# Altium PCB PCB1.PcbDoc
Units mil, origin at the board's own origin, x right, y up, seen from the top; angles counter-clockwise.
Board outline 3040 x 2075 mil, 2 copper layers (Top Layer, Bottom Layer); 44 components, 36 nets, 218 pads, 26 vias.
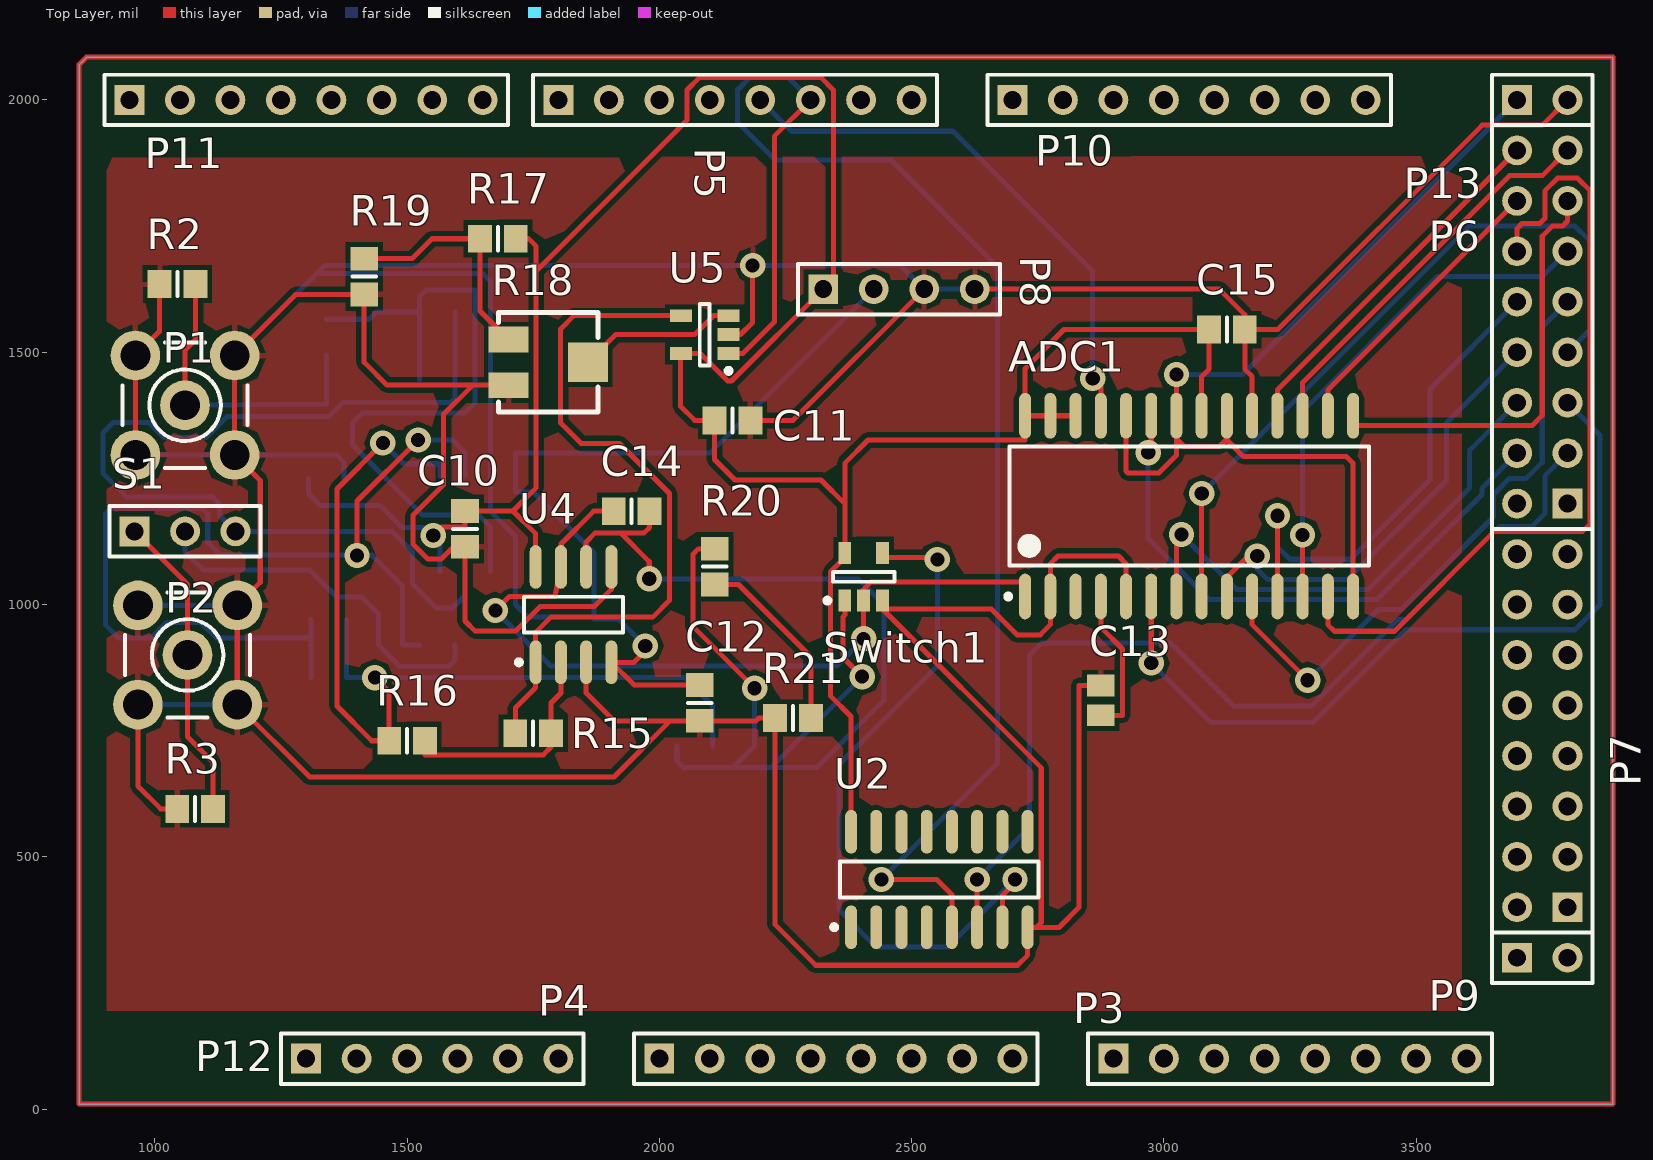
[diagram p0: Top Layer view]
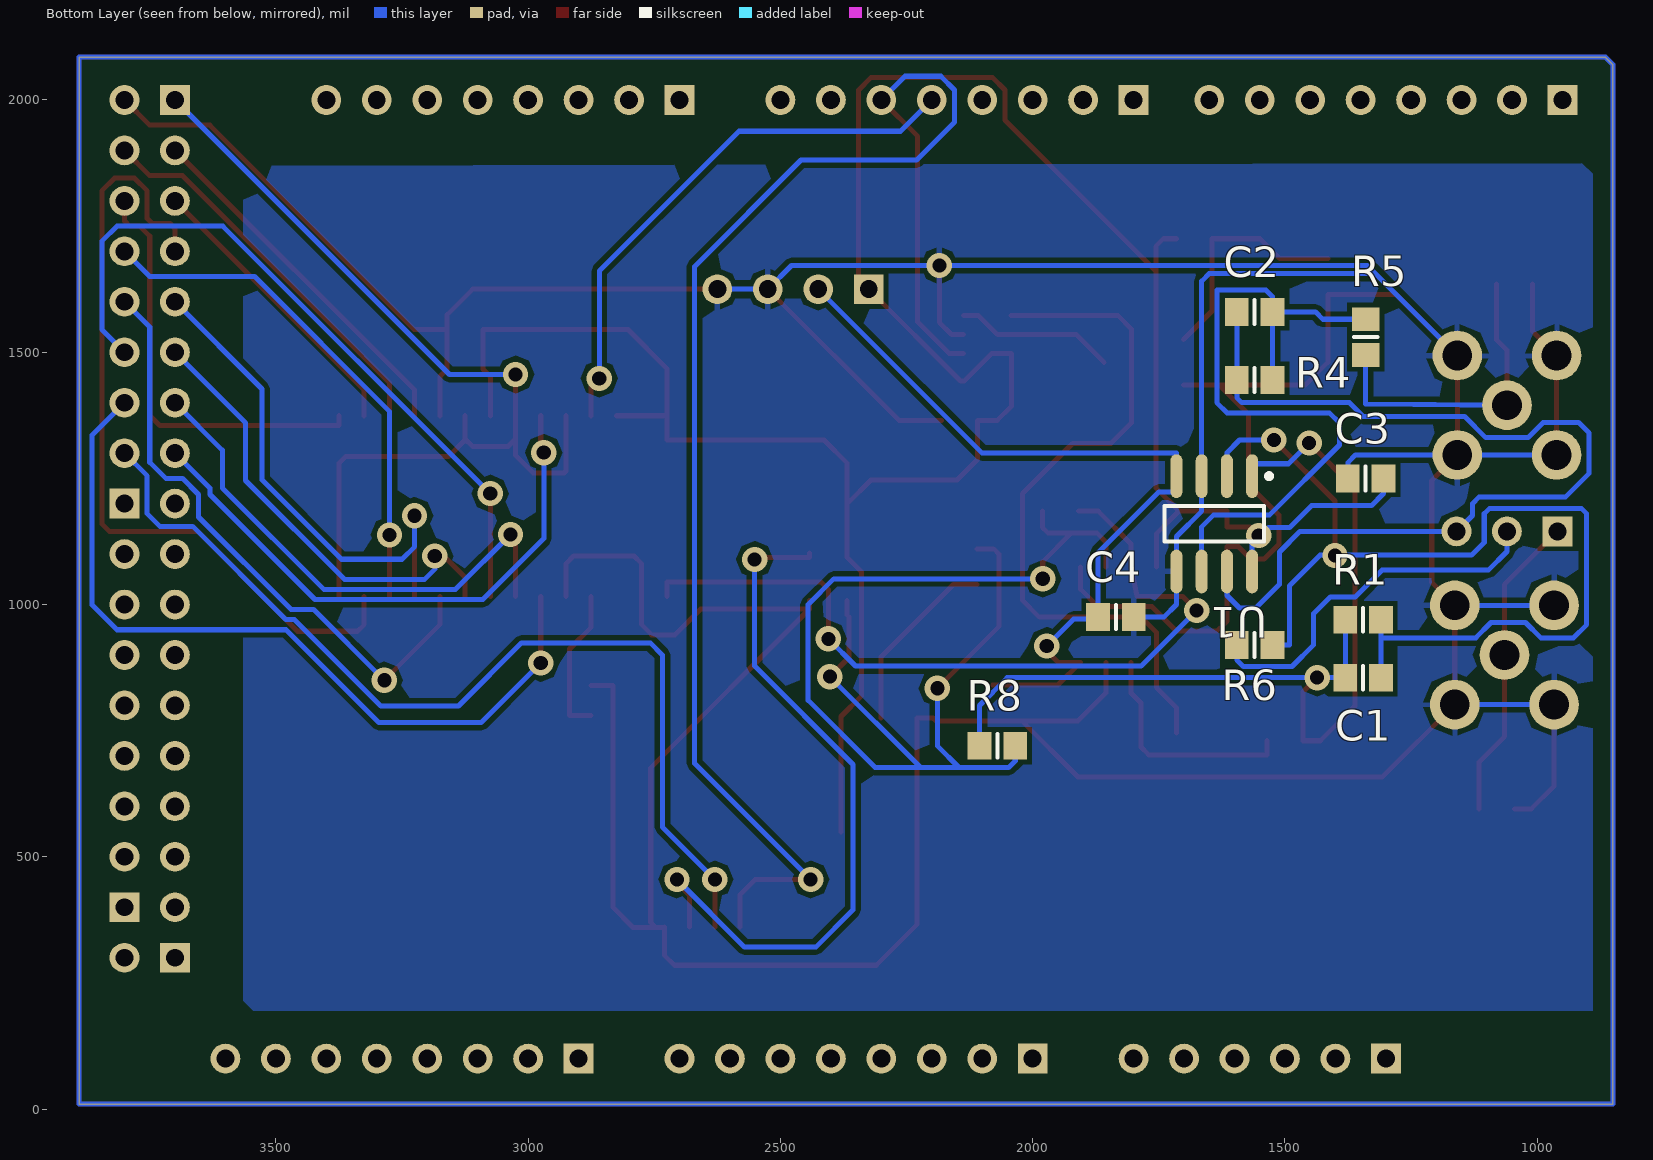
[diagram p1: Bottom Layer view, seen from below]

## Layer stack, top to bottom
Top Layer: signal copper 1.4
Dielectric: dielectric 12.6, FR-4, Dk 4.8
Bottom Layer: signal copper 1.4

## Board outline
850,10 850,2070 865,2085 3890,2085 3890,10

## Design rules (kind name [scope] priority, off if disabled: settings)
Clearance [All] p1: gap=10
PolygonConnect [All] p1: connectstyle=Relief reliefconductorwidth=10 reliefentries=4 polygonreliefangle="90 Angle"
RoomDefinition Sheet2 [InComponentClass('Sheet2')] p1: confinementstyle=ConfineIn formatcopy=TRUE lockcomponents=FALSE outline 850,10 3890,10 3890,2065 850,2065
RoomDefinition Sheet1 [InComponentClass('Sheet1')] p2: confinementstyle=ConfineIn formatcopy=TRUE lockcomponents=FALSE outline 850,10 3885,10 3885,2080 850,2080
RoutingTopology [InNetClass('digital')] p1: topology=Shortest
RoutingVias [All] p1: holewidth=28 width=50 viastyle="Through Hole" minholewidth=28 minwidth=50 maxholewidth=28 maxwidth=50
SilkscreenOverComponentPads [All] p1: minsilkscreentomaskgap=10
SolderMaskExpansion [All] p1: expansion=4
Width [All] p1: maxlimit=10 minlimit=10 preferedwidth=10
26 further rules are at their usual default settings.

## Classes and differential pairs
component class Sheet1: C1 C2 C3 C4 C10 C11 C12 P1 P2 R1 R2 R3 R4 R5 R6 R8 R15 R16 R17 R18 R19 S1 U1 U4 U5 V1 V2
net class digital: DGND NetADC1_6 NetADC1_7 NetADC1_8 NetADC1_9 NetADC1_10 NetADC1_11 NetADC1_12 NetADC1_13 NetADC1_15 NetADC1_16 NetADC1_17 NetADC1_18 NetADC1_23 NetADC1_25 NetP13_3
net class potencia: +5 -5 GND
component class Sheet2: ADC1 C13 C14 C15 P3 P4 P5 P6 P7 P8 P9 P10 P11 P12 P13 R20 R21 Switch1 U2
net class analog: NetADC1_1 NetADC1_4 NetC1_1 NetC1_2 NetC2_1 NetC2_2 NetC14_1 NetP1_1 NetP2_1 NetR6_1 NetR15_2 NetR17_2 NetR18_W

## Components (designator, comment, footprint, x,y, rotation, side; value= is the part's Value field where it differs from the comment)
ADC1 "LTC1415" SO28_N 3050,1195 r90 top
C1 "Cap" 6-0805_N 1345,855 r0 bottom
C2 "Cap" 6-0805_N 1560,1580 r0 bottom
C3 "Cap" 6-0805_N 1340,1250 r180 bottom
C4 "Cap" 6-0805_N 1835,975 r180 bottom
C10 "Cap" 6-0805_N 1615,1150 r90 top
C11 "Cap" 6-0805_N 2145,1365 r0 top
C12 "Cap" 6-0805_N 2080,805 r270 top
C13 "Cap Pol3" C0805 2875,810 r90 top
C14 "Cap" 6-0805_N 1945,1185 r180 top
C15 "Cap" 6-0805_N 3125,1545 r0 top
P1 "SMB" SMB_V-RJ45 1060,1395 r0 top
P2 "SMB" SMB_V-RJ45 1065,900 r0 top
P3 "Header 8" HDR1X8 2900,100 r0 top
P4 "Header 8" HDR1X8 2000,100 r0 top
P5 "Header 8" HDR1X8 1800,2000 r0 top
P6 "Header 2" HDR1X2 3700,2000 r0 top
P7 "Header 8X2" HDR2X8 3800,400 r90 top
P8 "Header 4" HDR1X4 2325,1625 r0 top
P9 "Header 2" HDR1X2 3700,300 r0 top
P10 "Header 8" HDR1X8 2700,2000 r0 top
P11 "Header 8" HDR1X8 950,2000 r0 top
P12 "Header 6" HDR1X6 1300,100 r0 top
P13 "Header 8X2" HDR2X8 3800,1200 r90 top
R1 "Res3" 6-0805_N 1345,970 r0 bottom
R2 "Res3" 6-0805_N 1045,1635 r0 top
R3 "Res3" 6-0805_N 1080,595 r0 top
R4 "Res3" 6-0805_N 1560,1445 r180 bottom
R5 "Res3" 6-0805_N 1340,1530 r270 bottom
R6 "Res3" 6-0805_N 1560,920 r180 bottom
R8 "Res3" 6-0805_N 2070,720 r180 bottom
R15 "Res3" 6-0805_N 1750,745 r180 top
R16 "Res3" 6-0805_N 1500,730 r0 top
R17 "Res3" 6-0805_N 1680,1725 r180 top
R18 "RPot SM" POT4MM-2 1780,1480 r0 top
R19 "Res3" 6-0805_N 1415,1650 r90 top
R20 "Res3" 6-0805_N 2110,1075 r90 top
R21 "Res3" 6-0805_N 2265,775 r0 top
S1 "SW-SPDT" HDR1X3 960,1145 r0 top
Switch1 "SN74LVC1G66DBVR" SOT23-5_N 2405,1055 r90 top
U1 "THS4062" S8_N 1640,1160 r270 bottom
U2 "SN74LS279AD" D016_N 2555,455 r90 top
U4 "THS4062" S8_N 1830,980 r90 top
U5 "ADCMP600" SOT23-5_N 2090,1535 r180 top

## Footprints (in the part's own frame and the unit in brackets; to place one, negate y for a bottom-side part, rotate by r counter-clockwise, add the part's x,y. Pads: shape width x height; smd on the part's side, far side on the other; paste and mask are expansions set on the pad)
6-0805_N [mm] "Chip Resistor, Body 2.0x1.2mm, IPC Medium Density"
  rect 1.2x1.4 smd: 1(-0.9,0) 2(0.9,0)
  silkscreen extent 0,-0.6 0,0.6, body extent -1.07,-0.7 1.07,0.7, height 0.7
C0805 [mm] "Chip Capacitor, Body 2.0x1.3mm, IPC High Density"
  rect 1.1x1.4 smd: 1(-0.75,0) 2(0.75,0)
  body extent -1.1,-0.72 1.1,0.72, height 1.4
D016_N [mm] "SOIC, 16-Leads, Body 9.9x3.9mm, Pitch 1.27mm, IPC Medium Density"
  oval 2.2x0.6 smd: 1(-2.4,4.445) 2(-2.4,3.175) 3(-2.4,1.905) 4(-2.4,0.635) 5(-2.4,-0.635) 6(-2.4,-1.905) 7(-2.4,-3.175) 8(-2.4,-4.445) 9(2.4,-4.445) 10(2.4,-3.175) 11(2.4,-1.905) 12(2.4,-0.635) 13(2.4,0.635) 14(2.4,1.905) 15(2.4,3.175) 16(2.4,4.445)
  silkscreen extent -2.52,-5 0.9,5.42, body extent -1.95,-4.95 1.95,4.95, height 1.75
HDR1X2 [mm] "Connector; Header; 2 Position"
  rect 1.5x1.5 hole 0.9: 1(0,0)
  round 1.5 hole 0.9: 2(2.54,0)
  silkscreen extent -1.27,-1.27 3.81,1.27
HDR1X3 [mm] "Connector; Header; 3 Position"
  rect 1.5x1.5 hole 0.9: 1(0,0)
  round 1.5 hole 0.9: 2(2.54,0) 3(5.08,0)
  silkscreen extent -1.27,-1.27 6.35,1.27
HDR1X4 [mm] "Connector; Header; 4 Position"
  rect 1.5x1.5 hole 0.9: 1(0,0)
  round 1.5 hole 0.9: 2(2.54,0) 3(5.08,0) 4(7.62,0)
  silkscreen extent -1.27,-1.27 8.89,1.27
HDR1X6 [mm] "Connector; Header; 6 Position"
  rect 1.5x1.5 hole 0.9: 1(0,0)
  round 1.5 hole 0.9: 2(2.54,0) 3(5.08,0) 4(7.62,0) 5(10.16,0) 6(12.7,0)
  silkscreen extent -1.27,-1.27 13.97,1.27
HDR1X8 [mm] "Connector; Header; 8 Position"
  rect 1.5x1.5 hole 0.9: 1(0,0)
  round 1.5 hole 0.9: 2(2.54,0) 3(5.08,0) 4(7.62,0) 5(10.16,0) 6(12.7,0) 7(15.24,0) 8(17.78,0)
  silkscreen extent -1.27,-1.27 19.05,1.27
HDR2X8 [mm] "Connector; Header; 8x2 Position"
  rect 1.5x1.5 hole 0.9: 1(0,0)
  round 1.5 hole 0.9: 2(0,2.54) 3(2.54,0) 4(2.54,2.54) 5(5.08,0) 6(5.08,2.54) 7(7.62,0) 8(7.62,2.54) 9(10.16,0) 10(10.16,2.54) 11(12.7,0) 12(12.7,2.54) 13(15.24,0) 14(15.24,2.54) 15(17.78,0) 16(17.78,2.54)
  silkscreen extent -1.27,-1.27 19.05,3.81
POT4MM-2 [mm] "Square Trimming Potentiometer"
  rect 2x1.3 smd: CCW(-2,-1.15) CW(-2,1.15)
  rect 2x2 smd: W(2,0)
  silkscreen extent -2.5,-2.5 2.5,2.5
S8_N [mm] "SOIC, 8-Leads, Body 4.9x3.9mm, Pitch 1.27mm, IPC Medium Density"
  oval 2.2x0.6 smd: 1(-2.4,1.905) 2(-2.4,0.635) 3(-2.4,-0.635) 4(-2.4,-1.905) 5(2.4,-1.905) 6(2.4,-0.635) 7(2.4,0.635) 8(2.4,1.905)
  silkscreen extent -2.52,-2.5 0.9,2.88, body extent -2,-2.5 2,2.5, height 1.76
SMB_V-RJ45 [mm] "Connector; SMB Straight"
  round 2.5 hole 1.5: 1(0,0) 2(-2.5,-2.5) 2(-2.5,2.5) 2(2.5,-2.5) 2(2.5,2.5)
  silkscreen extent -3.15,-3.15 3.15,3.15
SO28_N [mm] "28-Pin Plastic Small Outline Integrated Circuit 1.27 mm Pitch, IPC Medium Density"
  oval 2.3x0.6 smd: 1(-4.55,8.255) 2(-4.55,6.985) 3(-4.55,5.715) 4(-4.55,4.445) 5(-4.55,3.175) 6(-4.55,1.905) 7(-4.55,0.635) 8(-4.55,-0.635) 9(-4.55,-1.905) 10(-4.55,-3.175) 11(-4.55,-4.445) 12(-4.55,-5.715) 13(-4.55,-6.985) 14(-4.55,-8.255) 15(4.55,-8.255) 16(4.55,-6.985) 17(4.55,-5.715) 18(4.55,-4.445) 19(4.55,-3.175) 20(4.55,-1.905) 21(4.55,-0.635) 22(4.55,0.635) 23(4.55,1.905) 24(4.55,3.175) 25(4.55,4.445) 26(4.55,5.715) 27(4.55,6.985) 28(4.55,8.255)
  silkscreen extent -4.67,-9.05 3,9.23, body extent -3.8,-9.06 3.8,9.06, height 2.65
SOT23-5_N [mm] "SOT23, 5-Leads, Body 2.9x1.6mm, Pitch 0.95mm, Lead Span 2.8mm, IPC Medium Density"
  rect 1.1x0.65 smd: 1(-1.2,0.95) 2(-1.2,0) 3(-1.2,-0.95) 4(1.2,-0.95) 5(1.2,0.95)
  silkscreen extent -1.32,-1.55 0.25,1.95, body extent -0.9,-1.55 0.9,1.55, height 1.45

## Part data
C1 C2 C3 C4 C10 C11 C12 C14 C15: "Capacitor"
C13: "Polarized Capacitor (Surface Mount)"
P1 P2: "SMB Straight Connector"
P3 P4 P5 P10 P11: "Header, 8-Pin"
P6 P9: "Header, 2-Pin"
P7 P13: "Header, 8-Pin, Dual row"
P8: "Header, 4-Pin"
P12: "Header, 6-Pin"
R1 R2 R3 R4 R5 R6 R8 R15 R16 R17 R19 R20 R21: "Resistor"
R18: "Square Trimming Potentiometer"
S1: "SPDT Subminiature Toggle Switch, Right Angle Mounting, Vertical Actuation"
U1 U4: library part LT1253CS8, "Low Cost Dual Video Amplifier"
U2: "Quadruple S-R Latches"

## Via types
v1: diameter 50, hole 28, Top Layer to Bottom Layer, 26 vias

## Nets (pads, with @x,y where several pads share a name; then routed paths per layer and width w, separated by ;. In a path a pad name is that pad's centre, name@x,y a point inside that pad or via, vN(x,y) a via of type N, cw(c..) or ccw(c..) an arc to the next point about the centre after c; other vN are vias at no path point)
+5: ADC1.21 ADC1.26 ADC1.27 ADC1.28 C3.2 C10.2 C11.1 C15.1 P8.1 R17.1 Switch1.5 U1.8 U2.16 U4.8 U5.5 | length 5421.5
  Top Layer w10: v1(1552,1137) 1569,1154 1615,1154 C10.2 1710,1185.43 ; R17.1 1741,1725 1756,1710 1756,1661 ; U4.8 1755,1140.43 1710,1185.43 ; U2.16 2380,778.2 2339,819.2 2339,1064.4 2367.6,1093 Switch1.5 2367.6,1200 ; ADC1.26 ADC1.27 ADC1.28 ; ADC1.21 3075,1452 3089.57,1466.57 C15.1 2802,1545 2725,1468 ADC1.28 ; 1710,1185.43 1756,1231.43 1756,1661 ; 1756,1661 2055,1960 2055,2020 2080,2045 2320,2045 2345,2020 2345,1625 P8.1 2143,1443 2135.6,1443 2081,1497.6 U5.5 2042,1497.6 2042,1393 2070,1365 C11.1 2109.57,1287.43 2150,1247 2320.6,1247 2367.6,1200 ; 2367.6,1200 2367.6,1280 2413.6,1326 2725,1326 ADC1.28
  Bottom Layer w10: C3.2 1304.57,1220 1328.57,1196 1447.43,1196 1490.57,1152.86 1532.14,1152.86 v1@1565,1120 ; v1(1552,1137) 1565,1124 v1@1565,1120 ; U1.8 v1@1565,1120
-5: C4.1 C12.1 P8.2 U1.4 U4.4 | length 1662.3
  Top Layer w10: v1(1972,918) 1972,907.51 1950,885.51 U4.4 1950.08,840.43 C12.1
  Bottom Layer w10: v1(1972,918) 1919,971 1870.43,971 C4.1 1870.43,1102.57 1750,1223 1715,1223 U1.4 1715,1300 2100,1300 P8.2
DGND: ADC1.14 ADC1.20 ADC1.22 ADC1.24 P6.1 | length 1979.7
  Top Layer w10: ADC1.24 2925,1264.72 2928.86,1260.86 2990,1260.86 3025,1295.86 3025,1328 ; v1(3025,1456) ADC1.22 3025,1328 ; ADC1.20 3125,1328 ; ADC1.14 3375,1280 3362,1293 3158,1293 3125,1326 3125,1328 ; 3025,1328 3040,1313 3110,1313 3125,1328
  Bottom Layer w10: v1(3025,1456) 3156,1456 P6.1
GND: ADC1.2 ADC1.5 ADC1.19 C3.1 C4.2 C10.1 C11.2 C12.2 C13.2 C15.2 P1.2 P2.2 P6.2 P8.3 P8.4 R2.1 R3.1 R18.CCW R19.1 R21.1 Switch1.3 U1.3 U1.5 U2.8 U4.3 U4.5 U5.2 | length 13359.6
  Top Layer w10: P1.2@961.57,1296.57 961.57,1493.43 1009.57,1541.42 R2.1 ; P2.2@966.57,801.57 966.57,640 1011.57,595 R3.1 ; R18.CCW 1630,1434.72 ; U4.3 1855,824.57 1910,769.57 2021.57,769.57 ; U4.5 1905,1030 1871.18,996.18 1763.98,996.18 1715,947.2 1635,947.2 1615,967.2 C10.1 1592,1114.57 1567.43,1090 1541.43,1090 1512,1119.43 1512,1177 1572,1237 1572,1376.72 1630,1434.72 ; U5.2 2161,1535 2185,1559 v1(2185,1672) ; C11.2 2265,1365 P8.3 ; Switch1.3 Switch1.3@2442.4,991 ; P8.4 3110,1625 3160.43,1574.57 C15.2 ; U2.8 U2.8@2730,360 ; C13.2 2832,839.53 2832,400 2792,360 2747,360 ; ADC1.5 2925,1081 2910,1096 2790,1096 2775,1081 ADC1.2 2775,960 2755,940 2709,940 2658,991 Switch1.3@2442.4,991 ; ADC1.19 3175,1452 3160.43,1466.57 C15.2 ; P6.2 3750,1950 3631,1950 3226,1545 C15.2 ; 1630,1434.72 1460.28,1434.72 1415,1480 R19.1 1279.57,1614.57 1158.43,1493.43 1158.43,1296.57 1209,1246 1209,1044 1163.43,998.43 1163.43,801.57 1307,658 1910,658 2021.57,769.57 ; 2021.57,769.57 C12.2 2192,769.57 2197.43,775 R21.1 2229.57,365.43 2310,285 2710,285 2730,305 U2.8@2730,360 ; Switch1.3@2442.4,991 2757,676.4 2757,370 2747,360 ; U2.8@2730,360 2747,360
  Bottom Layer w10: P1.2@961.57,1296.57 1158.43,1296.57 1360,1296.57 1375.43,1281.14 C3.1 ; P2.2@966.57,801.57 P2.2@1163.43,801.57 ; P2.2@966.57,998.43 P2.2@1163.43,998.43 ; P1.2@1158.43,1493.43 1321,1656 ; C4.2 1740,975 1715,1000 U1.5 1715,1135 1665,1185 U1.3 1665,1641 1650,1656 1321,1656 ; P8.4 P8.3 2478,1672 v1(2185,1672) 1337,1672 1321,1656
NetADC1_1: ADC1.1 C14.2 Switch1.2 U4.7 | length 1617.6
  Top Layer w10: v1(1675,988) 1703.18,1016.18 1793.19,1016.18 U4.7 1805,1120 1870,1185 C14.2 ; v1(2405,932) Switch1.2 2405,1030 2420,1045 2725,1045 ADC1.1
  Bottom Layer w10: v1(1675,988) 1785,878 2351,878 v1(2405,932)
NetADC1_4: ADC1.4 C13.1 | length 296.2
  Top Layer w10: C13.1 2918,780.47 2918,912 2875,955 ADC1.4
NetADC1_6: ADC1.6 P13.5 | length 1594.2
  Top Layer w10: v1(2975,884) ADC1.6
  Bottom Layer w10: v1(2975,884) 3093,766 3296,766 3480,950 3815,950 3864.53,999.53 3864.53,1335.47 P13.5
NetADC1_7: ADC1.7 P13.6 | length 1034.6
  Top Layer w10: ADC1.7 3025,1129 v1(3035,1139)
  Bottom Layer w10: v1(3035,1139) 3144,1030 3405.05,1030 3606,1230.95 3606,1306 P13.6
NetADC1_8: ADC1.8 P13.7 | length 1444.7
  Top Layer w10: ADC1.8 v1(3075,1220)
  Bottom Layer w10: v1(3075,1220) 3605,1750 3815,1750 3845,1720 3845,1545 P13.7
NetADC1_9: ADC1.9 P13.8 | length 918.1
  Top Layer w10: ADC1.9 3125,1054 3167,1096 v1(3185,1096)
  Bottom Layer w10: v1(3185,1096) 3185,1070 3205,1050 3364.17,1050 3560,1245.83 3560,1360 P13.8
NetADC1_10: ADC1.10 P13.9 | length 1220.3
  Top Layer w10: ADC1.10 3175,960 v1(3285,850)
  Bottom Layer w10: v1(3285,850) 3425,990 3469.74,990 3653.2,1173.47 3653.2,1218.2 3685,1250 3718.02,1250 3750,1281.98 3750,1550 P13.9
NetADC1_11: ADC1.11 P13.10 | length 1023.6
  Top Layer w10: ADC1.11 v1(3225,1176)
  Bottom Layer w10: v1(3225,1176) 3225,1114.71 3250,1089.71 3369.71,1089.71 3527.31,1247.31 3527.31,1427.31 P13.10
NetADC1_12: ADC1.12 P13.11 | length 1023.4
  Top Layer w10: ADC1.12 v1(3275,1138)
  Bottom Layer w10: v1(3275,1138) 3275,1383 3542,1650 3750,1650 P13.11
NetADC1_13: ADC1.13 P13.12 | length 1603.5
  Top Layer w10: ADC1.13 3325,960 3338,947 3457,947 3655,1145 3830,1145 3845,1160 3845,1820 3820,1845 3780,1845 3755,1820 3755,1765 3745,1755 3710,1755 3700,1745 P13.12
NetADC1_15: ADC1.15 P13.13 | length 859.8
  Top Layer w10: ADC1.15 3375,1355 3730,1355 3750,1375 3750,1730 3770,1750 3790,1750 3800,1760 P13.13
NetADC1_16: ADC1.16 P13.14 | length 581.2
  Top Layer w10: ADC1.16 3325,1425 P13.14
NetADC1_17: ADC1.17 P13.15 | length 781.4
  Top Layer w10: ADC1.17 3275,1440 3685,1850 3750,1850 P13.15
NetADC1_18: ADC1.18 P13.16 | length 722.6
  Top Layer w10: ADC1.18 3225,1425 P13.16
NetADC1_23: ADC1.23 P13.4 | length 1154.3
  Top Layer w10: v1(2969,1301) 2975,1307 ADC1.23
  Bottom Layer w10: v1(2969,1301) 2969,1130.75 3089.75,1010 3422.52,1010 3630.59,1218.07 3630.59,1230.59 P13.4
NetADC1_25: ADC1.25 P5.5 | length 1092.9
  Top Layer w10: v1(2859,1448) 2875,1432 ADC1.25
  Bottom Layer w10: P5.5 2262,1938 2582,1938 2859,1661 v1(2859,1448)
NetC1_1: C1.1 R1.1 R6.2 U1.2 | length 2048.8
  Top Layer w10: v1(1401,1097) 1401,1205 v1(1522,1326)
  Bottom Layer w10: C1.1 1309.57,934 ; R1.1 1309.57,934 ; v1(1401,1097) v1@1401,1098 ; v1(1522,1326) 1590,1326 1615,1301 U1.2 ; R6.2 1491,920 1491,1037 1430,1098 v1@1401,1098 ; 1309.57,934 1121.81,934 1091.6,964.21 1023.17,964.21 992.96,934 928,934 902,960 902,1180 912,1190 1095,1190 1105,1180 1105,1123 1130,1098 v1@1401,1098
NetC1_2: C1.2 R1.2 R8.1 R16.1 U1.1 | length 1924.9
  Top Layer w10: v1(1436.14,855) 1464.57,826.57 R16.1 1430,730 1361,799 1361,1229 v1(1452,1320)
  Bottom Layer w10: R1.2 C1.2 v1(1436.14,855) 2050.43,855 2105.43,800 R8.1 ; v1(1452,1320) 1493,1279 1565,1279 U1.1
NetC2_1: C2.1 R4.2 R5.1 U1.6 | length 1426.6
  Bottom Layer w10: R5.1 1425,1565.43 1439.57,1580 C2.1 ; R4.2 C2.1 ; U1.6 1665,1154 1642,1177 1531,1177 1392,1316 1392,1360 1412,1380 1615,1380 1635,1400 1635,1623 1537.57,1623 1524.57,1610 C2.1
NetC2_2: C2.2 R4.1 S1.3 U1.7 | length 1940
  Bottom Layer w10: C2.2 1595.43,1512 R4.1 1595.43,1410 1585.43,1400 1372,1400 1344.8,1372.8 1143.84,1372.8 1101.83,1330.79 1018.17,1330.79 988.17,1360.79 917.79,1360.79 897,1340 897,1260 943.56,1213.44 1115,1213.44 1128.44,1200 1128.44,1176.56 S1.3 1470,1145 1511,1104 1511,1040 1558,993 1590,993 1615,1018 U1.7
NetC14_1: C14.1 R8.2 R20.2 Switch1.1 U4.6 | length 2472.1
  Top Layer w10: U4.6 1855,1124 1873,1142 1923,1142 ; v1(1980,1051) 1980,1085 1923,1142 ; C14.1 1980.43,1152.43 1970,1142 1923,1142 ; R20.2 2077.43,1110.43 2067,1100 2067,956 v1(2189,834) ; Switch1.1 2367.6,979 2364,975.4 2364,895 v1(2402,857)
  Bottom Layer w10: v1(1980,1051) 2394,1051 2445,1000 2445,810 2312,677 2222,677 ; R8.2 2034.57,690 2047.57,677 2146,677 ; v1(2189,834) 2189,720 2146,677 ; v1(2402,857) 2222,677 ; 2146,677 2222,677
NetP1_1: P1.1 R2.2 R5.2 | length 626
  Top Layer w10: P1.1 1060,1504 1080.43,1524.43 R2.2
  Bottom Layer w10: P1.1 1340,1397 R5.2
NetP2_1: P2.1 R3.2 S1.1 | length 614.4
  Top Layer w10: S1.1 1065,1040 P2.1 1065,738 1115.43,687.57 R3.2
NetP5_6: P5.6 U2.5 U5.1 | length 2986.7
  Top Layer w10: U5.1 2165.6,1497.6 2228,1560 2228,1928 P5.6 ; v1(2440,455) 2550,455 2580,425 U2.5
  Bottom Layer w10: P5.6 2253,2047 2182,2047 2155,2020 2155,1956 2230,1881 2459,1881 2670,1670 2670,685 v1(2440,455)
NetP13_3: P13.3 U2.6 | length 1961.7
  Top Layer w10: U2.6 v1(2630,455)
  Bottom Layer w10: v1(2630,455) 2734,559 2734,900 2758,924 3013,924 3138,799 3292,799 3463,970 3480,970 3665,1155 3730,1155 3755,1180 3755,1255 P13.3
NetR6_1: R6.1 S1.2 | length 741.6
  Bottom Layer w10: S1.2 1060,1105 1097,1068 1307.86,1068 1360.86,1015 1410,1015 1443,982 1443,920 1486,877 1582.43,877 1595.43,890 R6.1
NetR15_1: R15.1 R16.2 U4.2 | length 460.6
  Top Layer w10: R16.2 1535.43,702 1770,702 1785.43,717.43 R15.1 1785.43,805 1805,824.57 U4.2
NetR15_2: R15.2 U4.1 U5.4 | length 1429.3
  Top Layer w10: R15.2 1714.57,795 1755,835.43 U4.1 1755,945 1785,975 1986.81,975 2020,1008.19 2020,1220 1921,1319 1845,1319 1804,1360 1804,1545.8 1830.6,1572.4 U5.4
NetR17_2: R17.2 R18.CW R19.2 | length 469.2
  Top Layer w10: R19.2 1510,1685.43 1549.57,1725 R17.2 1644.57,1581.97 R18.CW
NetR18_W: R18.W U5.3 | length 316.8
  Top Layer w10: R18.W 1913.74,1535 2070,1535 2107.4,1572.4 U5.3
NetR20_1: R20.1 R21.2 | length 371
  Top Layer w10: R20.1 2157,1039.57 2300.43,896.13 R21.2
NetSwitch1_4: Switch1.4 U2.7 | length 1434.3
  Top Layer w10: Switch1.4 2442.4,1093 2547,1093 v1(2551,1089) ; U2.7 2680,424 2705,449 v1(2705,455)
  Bottom Layer w10: v1(2551,1089) 2551,878 2356,683 2356,395 2430,321 2571,321 v1(2705,455)
pads on no net: ADC1.3 P3.1 P3.2 P3.3 P3.4 P3.5 P3.6 P3.7 P3.8 P4.1 P4.2 P4.3 P4.4 P4.5 P4.6 P4.7 P4.8 P5.1 P5.2 P5.3 P5.4 P5.7 P5.8 P7.1 P7.2 P7.3 P7.4 P7.5 P7.6 P7.7 P7.8 P7.9 P7.10 P7.11 P7.12 P7.13 P7.14 P7.15 P7.16 P9.1 P9.2 P10.1 P10.2 P10.3 P10.4 P10.5 P10.6 P10.7 P10.8 P11.1 P11.2 P11.3 P11.4 P11.5 P11.6 P11.7 P11.8 P12.1 P12.2 P12.3 P12.4 P12.5 P12.6 P13.1 P13.2 U2.1 U2.2 U2.3 U2.4 U2.9 U2.10 U2.11 U2.12 U2.13 U2.14 U2.15

## Polygon pours and split planes (outlines as drawn)
GND on Top Layer "Top Layer-No Net" (solid, pour order 8): 880,1885 905,1860 905,195 3590,195 3590,1885 3585,1890
GND on Bottom Layer "Top Layer-No Net" (solid, pour order 10): 885,1875 890.03,1870 890.03,195 3584.97,195 3590,190 3564.86,215 3564.86,1870

## Other copper
Multi-Layer:
  the board outline again, w10